# EAGLE board VNP (EAGLE 9.6.2)
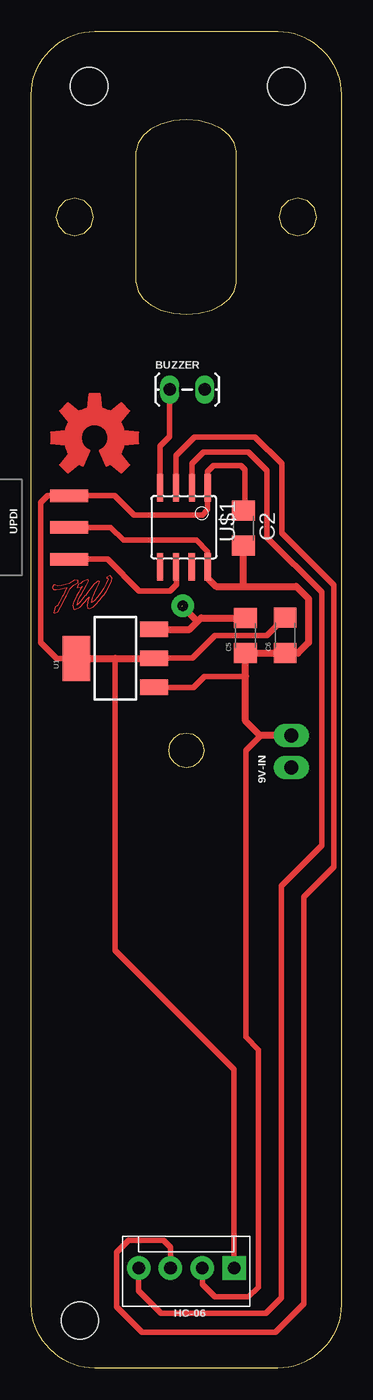
[diagram p0: board, top side]
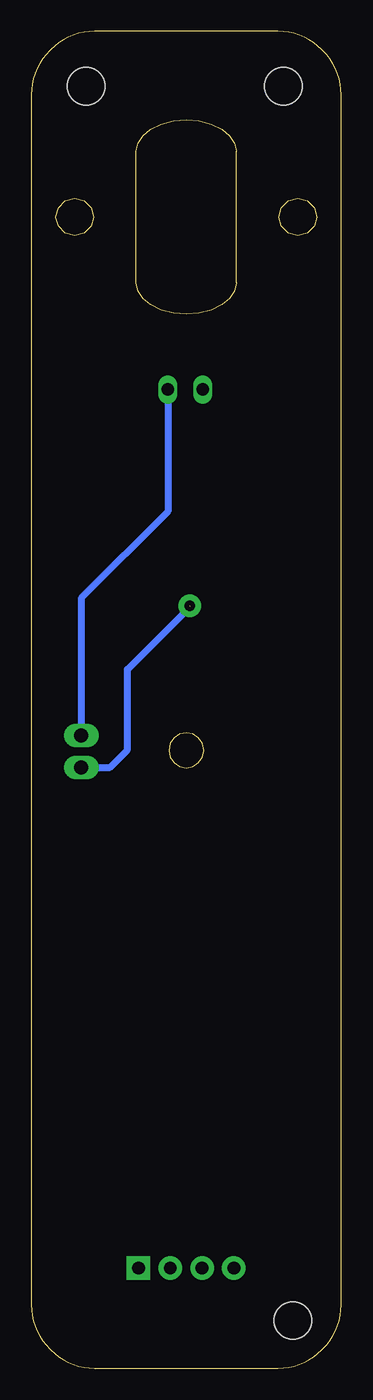
[diagram p1: board, bottom side, seen from below]

Size 24.76 x 106.68 mm. Coordinates in mm from the lower left corner, seen from the top.
Outline: 16.38,86.61 16.38,97.11 16.24,97.77 15.84,98.36 15.21,98.88 14.38,99.28 13.41,99.53 12.38,99.61 11.35,99.53 10.38,99.28 9.54,98.88 8.92,98.36 8.52,97.77 8.38,97.11 8.38,86.61
Outline: 16.38,86.61 16.38,86.61
Outline: 8.38,86.61 8.38,86.61
Outline: 8.38,86.61 8.52,85.96 8.92,85.36 9.54,84.85 10.38,84.45 11.35,84.2 12.38,84.11 13.41,84.2 14.38,84.45 15.21,84.85 15.84,85.36 16.24,85.96 16.38,86.61
Outline: 23.22,105.22 23.29,105.14 arc-45 24.76,101.61 24.76,5.07 arc-45 23.29,1.54 23.22,1.46 arc-45 19.69,0 5.07,0 arc-45 1.54,1.46 1.46,1.54 arc-45 0,5.07 0,101.61 arc-45 1.46,105.14 1.54,105.22 arc-45 5.07,106.68 19.69,106.68 arc-45 23.22,105.22
Outline: 22.79,91.86 22.59,92.61 22.04,93.16 21.29,93.36 20.54,93.16 19.99,92.61 19.79,91.86 19.99,91.11 20.54,90.57 21.29,90.36 22.04,90.57 22.59,91.11 22.79,91.86
Outline: 4.97,91.86 4.77,92.61 4.22,93.16 3.47,93.36 2.72,93.16 2.17,92.61 1.97,91.86 2.17,91.11 2.72,90.57 3.47,90.36 4.22,90.57 4.77,91.11 4.97,91.86
Outline: 10.99,49.3 11.09,49.83 11.39,50.29 11.85,50.59 12.38,50.69 12.91,50.59 13.37,50.29 13.67,49.83 13.77,49.3 13.67,48.77 13.37,48.31 12.91,48.01 12.38,47.91 11.85,48.01 11.39,48.31 11.09,48.77 10.99,49.3
Copper layers (1*16): Top 0.035mm / dielectric 1.5mm / Bottom 0.035mm
Design rules "OthermillDRC_30_deg_v2": minimum track width 6mil, minimum drill 0.8mm, track to track 6mil, track to pad 6mil, pad to pad 6mil, via to via 6mil, smd to smd 0mil, copper to edge 0mil, drill to drill 6mil, minimum pad ring 10mil, minimum via ring 10mil, stop-mask expansion 1mil, vias tented up to drill 30mil, thermal gap 6mil
Net classes: 0 default: width 0.457 mm; 2 vcc: width 0.559 mm
Holes 3 mm at 4.63,102.3 20.38,102.3 3.88,3.8

## Footprints (pad centres in the part's own frame; a part is rotated, then mirrored left to right if it is on the bottom)
1X02_LONGPADS = drill 1.118 pad 1.88 long: 1 0,0; 2 2.54,0
1X02_LOCK_LONGPADS = drill 1.016 long: 1 -0.127,0; 2 2.667,0
C1206 = smd 1.6 x 1.8: 1 -1.4,0; 2 1.4,0
1206 = smd 1.6 x 1.8: 1 -1.4,0; 2 1.4,0
MOLEX-1X4 = drill 1.016 pad 1.88 square: 1 0,0 | drill 1.016 pad 1.88: 2 2.54,0; 3 5.08,0; 4 7.62,0
SOT223 = smd 1.219 x 2.235: 1 -2.311,-3.099; 2 0,-3.099; 3 2.311,-3.099 | smd 3.6 x 2.2: 4 0,3.099
SOIC8 = smd 0.5 x 2.2: 1 -1.905,-3.154; 2 -0.645,-3.154; 3 0.625,-3.154; 4 1.895,-3.154; 5 1.905,3.154; 6 0.635,3.154; 7 -0.635,3.154; 8 -1.905,3.154
1X03_SMD_RA_MALE = smd 1 x 3: 1 -2.54,5; 2 0,5; 3 2.54,5

## Placement (x,y rotation side)
9V-IN  [1X02_LONGPADS]  20.76,47.94 90 top
BUZZER  [1X02_LOCK_LONGPADS]  11.19,78.1 0 top
C2  1uf  [C1206]  16.95,67.04 270 top
C5  10uf  [1206]  17.1,58.47 90 top
C6  10uf  [1206]  20.27,58.49 90 top
HC-06  [MOLEX-1X4]  16.2,8 180 top
U1  VR  [SOT223]  6.7,56.64 90 top
U$1  UC_ATTINY412SI  [SOIC8]  12.19,67.1 180 top
U$2  [OSHW-LOGO-L_COPPER]  5.06,74.24 0 top
UPDI  [1X03_SMD_RA_MALE]  -1.98,67.09 270 top

## Library data of the parts
9V-IN BUZZER = SparkFun-Connectors
C2 U1 = eagle_fab
C5 C6 = 01_SparkFun
HC-06 = SparkFun-Connectors; PROD_ID: CONN-08186; SF_ID: PRT-08231
U$1 = fab_new
U$2 = SparkFun-Aesthetics
UPDI = SparkFun-Connectors; PROD_ID: CONN-10925

## Nets
GND: 9V-IN.2 BUZZER.2 C2.2 C5.1 C6.1 HC-06.2 U1.1 U$1.8 UPDI.2
N$1 [vcc]: 9V-IN.1 C5.2 U1.3
N$2: U$1.6 UPDI.3
N$3: BUZZER.1 U$1.4
N$4: HC-06.3 U$1.3
N$5: HC-06.4 U$1.2
N$8: C2.1 C6.2 HC-06.1 U1.2 U1.4 U$1.1 UPDI.1

## Tracks (layer width: path | path; a pad name or v marks a point on that pad's centre or on a via)
GND
  Top 0.457: HC-06.2 13.66,6.69 14.66,5.69 17.36,5.69 18.14,6.47 18.14,25.42 17.13,26.42 17.13,49.29 18.3,50.45 | UPDI.2 6.34,67.09 7.37,66.06 13.2,66.06 14.09,65.17 14.09,63.13 | U1.1 12.97,54.33 13.83,55.2 17.11,55.2
  Top 0.559: 9V-IN.2 18.27,50.48 | 18.3,50.45 18.27,50.48 | 18.27,50.48 17.11,51.64 17.11,55.2 C5.1 20.25,57.07 C6.1 20.3,57.06 21.3,57.06 22.14,57.89 22.14,61.42 21.17,62.38 16.95,62.38 | U$1.8 14.09,63.13 14.09,63.06 14.77,62.38 16.95,62.38 | 16.95,62.38 C2.2
  Bottom 0.559: BUZZER.2 13.85,68.36 20.76,61.45 9V-IN.2
N$1  (1 unrouted)
  Top 0.559: U1.3 12.65,58.96 13.27,59.58 | C5.2 13.56,59.87 13.27,59.58 | 13.27,59.58 12.08,60.78 12.08,60.85
  Bottom 0.559: 9V-IN.1 18.47,47.94 17.08,49.33 17.08,55.76 12.04,60.79
N$2
  Top 0.457: UPDI.3 6.08,64.55 8.6,62.03 11.07,62.03 11.58,62.55 11.58,63.91 U$1.6
N$3
  Top 0.457: 10.26,70.28 U$1.4 10.28,70.26 10.28,73.57 11.06,74.35 BUZZER.1
N$4
  Top 0.457: U$1.3 11.56,72.83 13.05,74.32 17.88,74.32 20.02,72.18 20.02,66.64 24.15,62.51 24.15,39.99 21.76,37.61 21.76,5.14 19.49,2.87 8.85,2.87 6.81,4.91 6.81,9.26 7.77,10.22 10.55,10.22 11.12,9.65 HC-06.3
N$5
  Top 0.457: U$1.2 12.83,72.2 13.75,73.12 17.33,73.12 18.83,71.62 18.83,66.29 23.19,61.94 23.19,41.69 19.97,38.47 19.97,5.63 18.73,4.39 10.38,4.39 8.58,6.19 HC-06.4
N$6  (via drill 0.85 pad 1.8)
  other vias: 12.1,60.83
N$7
  Top 0.01: 2.53,61.67 2.48,61.57 2.28,61.18 2.07,60.81 2.03,60.81 1.89,60.73 1.8,60.3 1.86,60.26 2.13,60.38 2.35,60.72 2.54,61.08 2.72,61.44 2.84,61.67
N$8
  Top 0.457: C2.1 17.08,68.57 17.08,71.71 16.76,72.03 14.56,72.03 14.09,71.56 U$1.1 14.09,68.51 13.67,68.09 8.21,68.09 6.67,69.63 UPDI.1 | UPDI.1 3.03,69.64 | HC-06.1 16.2,23.83 6.71,33.32 6.71,56.64 | 4.35,56.64 2.02,56.64 0.76,57.9 0.76,69.08 1.31,69.62 UPDI.1 | U1.2 9.83,56.67 12.88,56.67 14.66,58.45 18.83,58.45 C6.2
  Top 0.559: U1.4 4.35,56.64 6.71,56.64 U1.2
N$9
  Top 0.01: 2.53,61.67 2.66,61.93 2.82,62.29 2.63,62.24 2.32,62.16 1.99,62.12 1.77,62.15 1.66,62.31 1.79,62.49 1.91,62.48 2.12,62.42 2.44,62.45 2.76,62.52 3.03,62.62 3.27,62.76 3.48,62.88 3.73,62.85 3.73,62.68 3.4,62.49 3.11,62.2 2.91,61.82 2.84,61.67
N$10
  Top 0.01: 5.77,61.67 5.75,61.64 5.47,61.29 5.17,60.96 4.93,60.75 4.64,60.64 4.51,60.68 4.46,60.83 4.51,61.19 4.63,61.54 4.53,61.46 4.23,61.08 3.9,60.73 3.47,60.53 3.39,60.58 3.32,60.86 3.39,61.16 3.57,61.54 3.64,61.67
N$11
  Top 0.01: 3.96,61.67 4,61.76 4.23,62.15 4.42,62.48 4.6,62.82 4.54,62.92 4.1,62.76 3.93,62.63 3.73,62.54 3.66,62.31 3.97,62.34 4.05,62.38 3.91,62.14 3.77,61.91 3.64,61.67
N$12
  Top 0.01: 5.39,61.67 5.29,61.53 5.01,61.21 4.8,61.08 4.89,61.48 4.97,61.67 | 4.33,61.67 | 4.97,61.67 5.04,61.86 5.22,62.23 5.4,62.6 5.46,62.78 5.34,62.82 5.02,62.56 4.75,62.22 4.51,61.91 4.33,61.67 | 4.97,61.67 | 4.33,61.67 4.28,61.61 4.04,61.31 3.91,61.15 3.65,60.9 3.8,61.36 3.96,61.67
N$13
  Top 0.01: 6.29,63.24 6.01,63.11 6.02,63.07 6.08,63.05 6.12,62.99 5.98,62.61 5.78,62.23 5.55,61.87 5.39,61.67 | 5.77,61.67 6,62.01 6.22,62.39 6.4,62.8 6.46,63.06
  Top 0.025: 6.46,63.06 6.29,63.24